# Altium PCB PCB_desing.PcbDoc
Units mm, origin at the board's own origin, x right, y up, seen from the top; angles counter-clockwise.
Board outline 50 x 39.8 mm, 2 copper layers (Top Layer, Bottom Layer), stack 1.671 mm thick; 35 components, 20 nets, 89 pads, 10 vias.
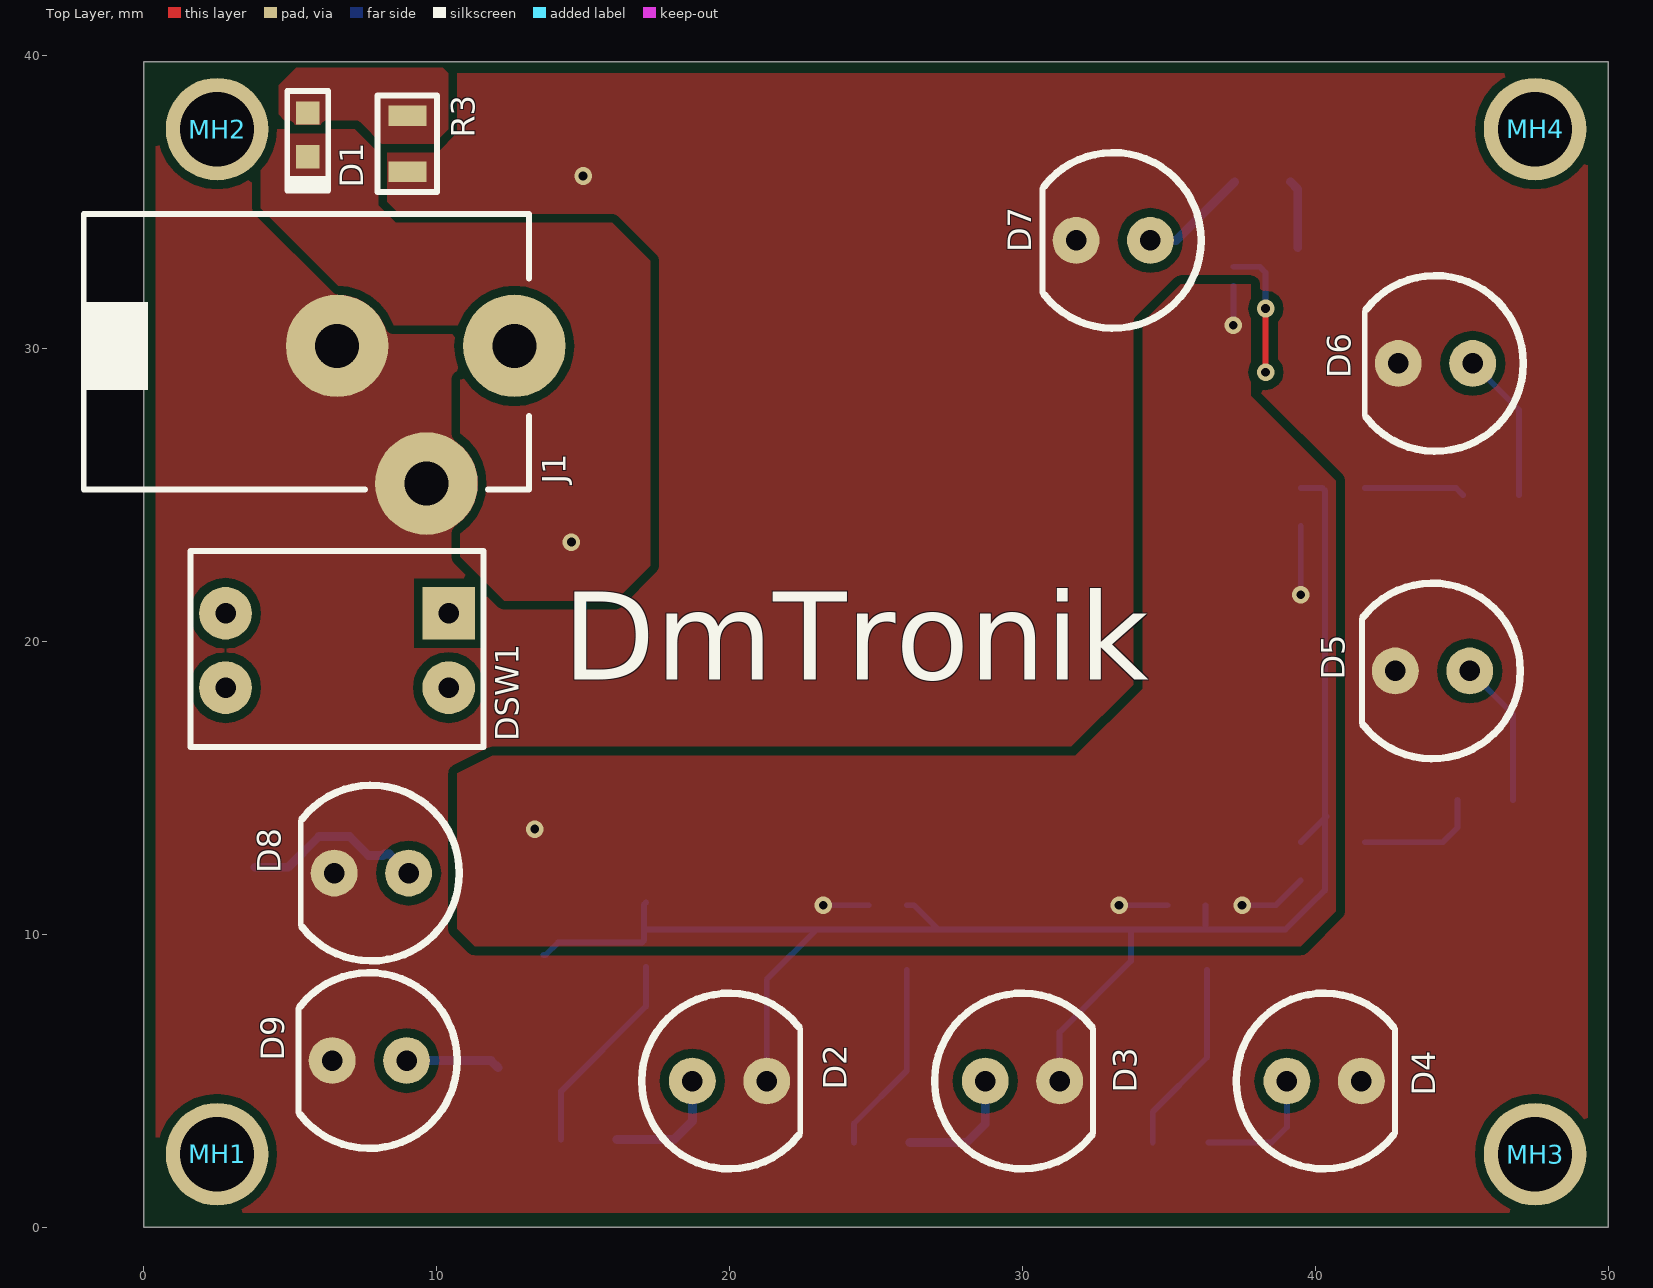
[diagram p0: Top Layer view]
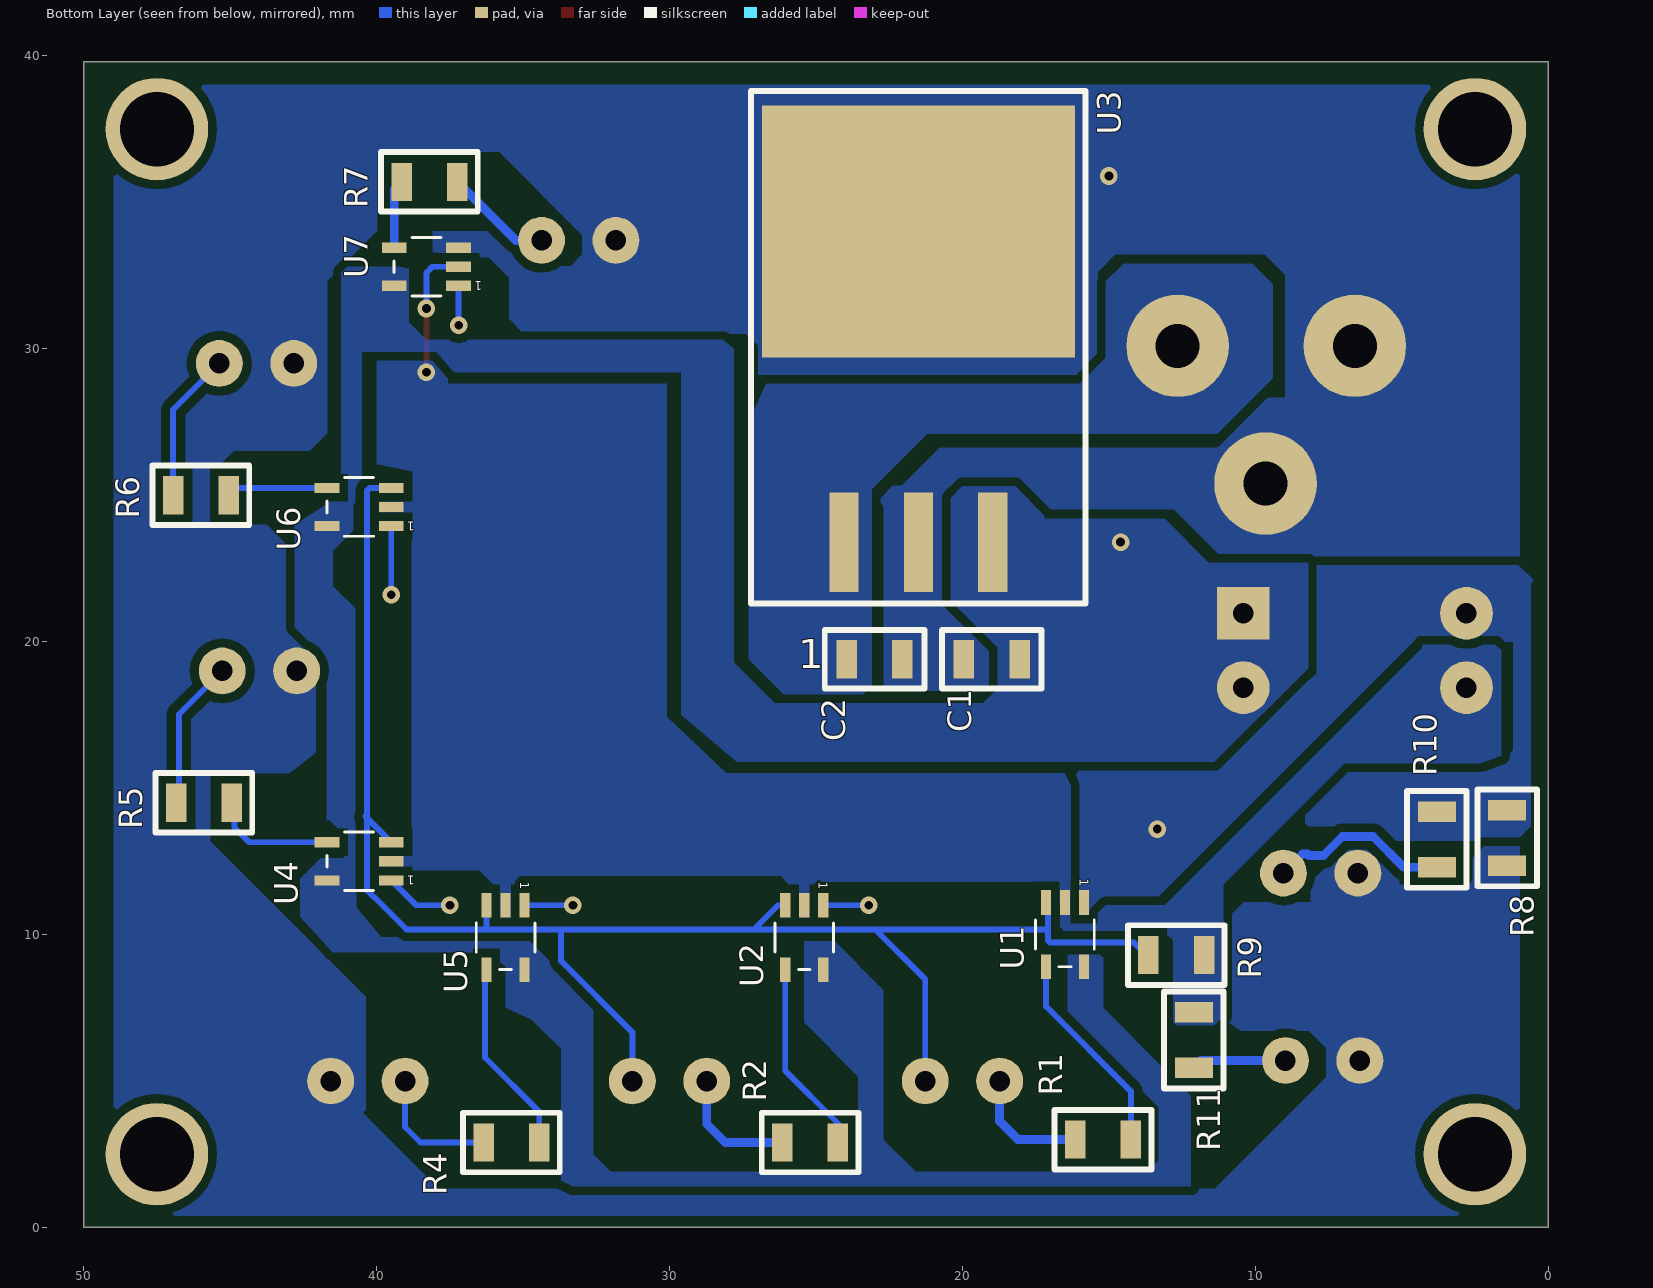
[diagram p1: Bottom Layer view, seen from below]
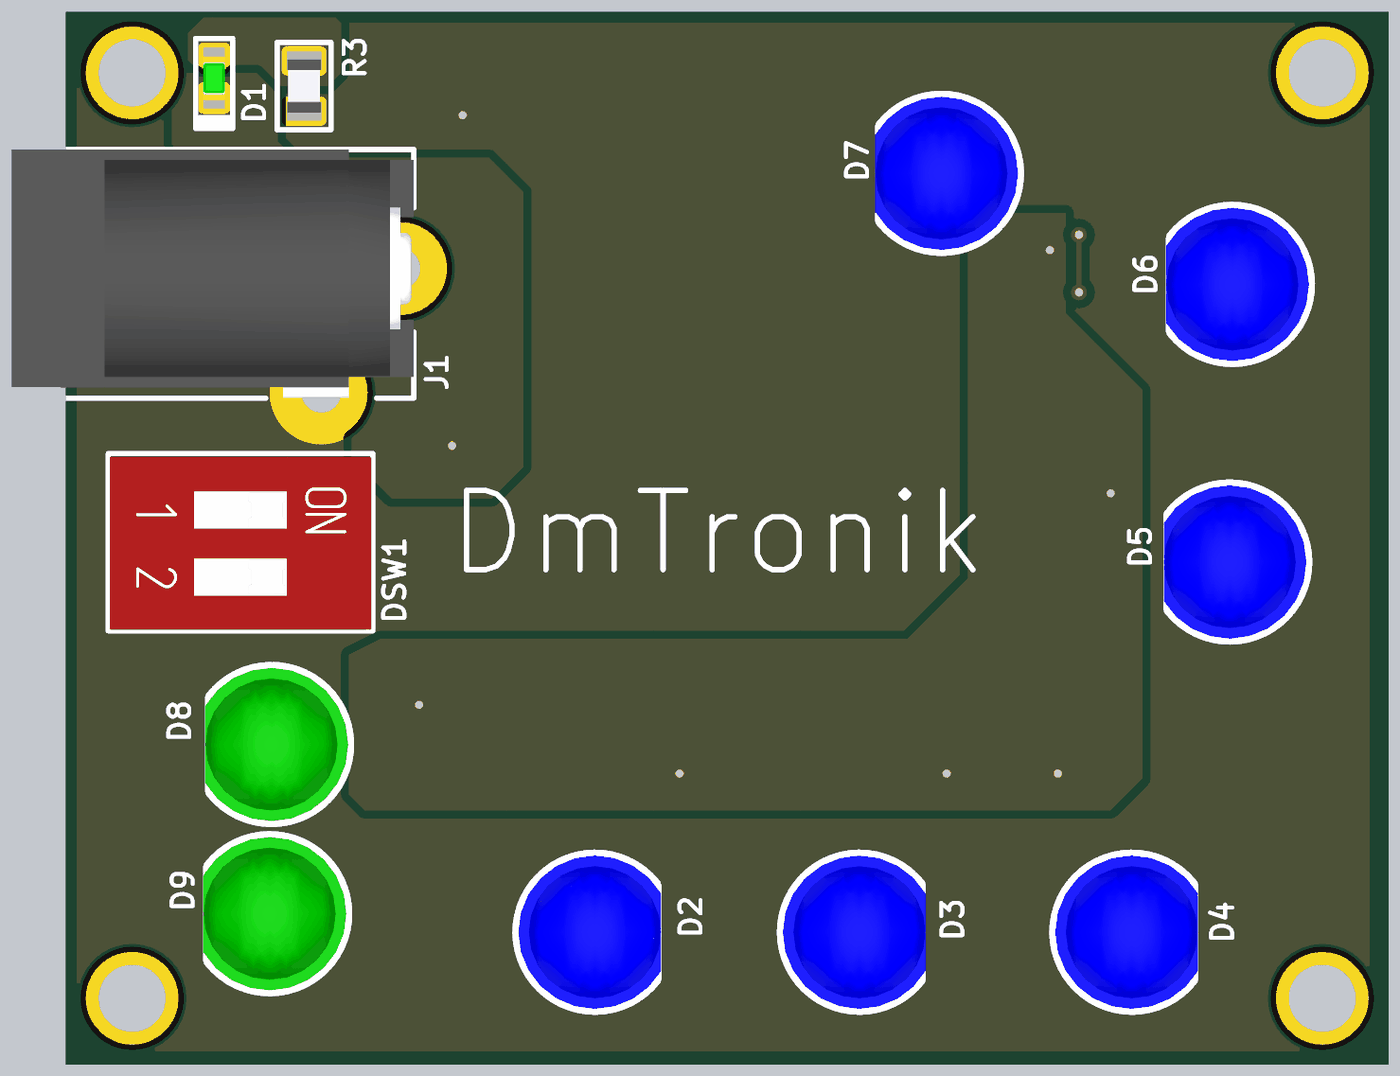
[diagram p2: 3D render of the assembled board from above, using the file's embedded part models]
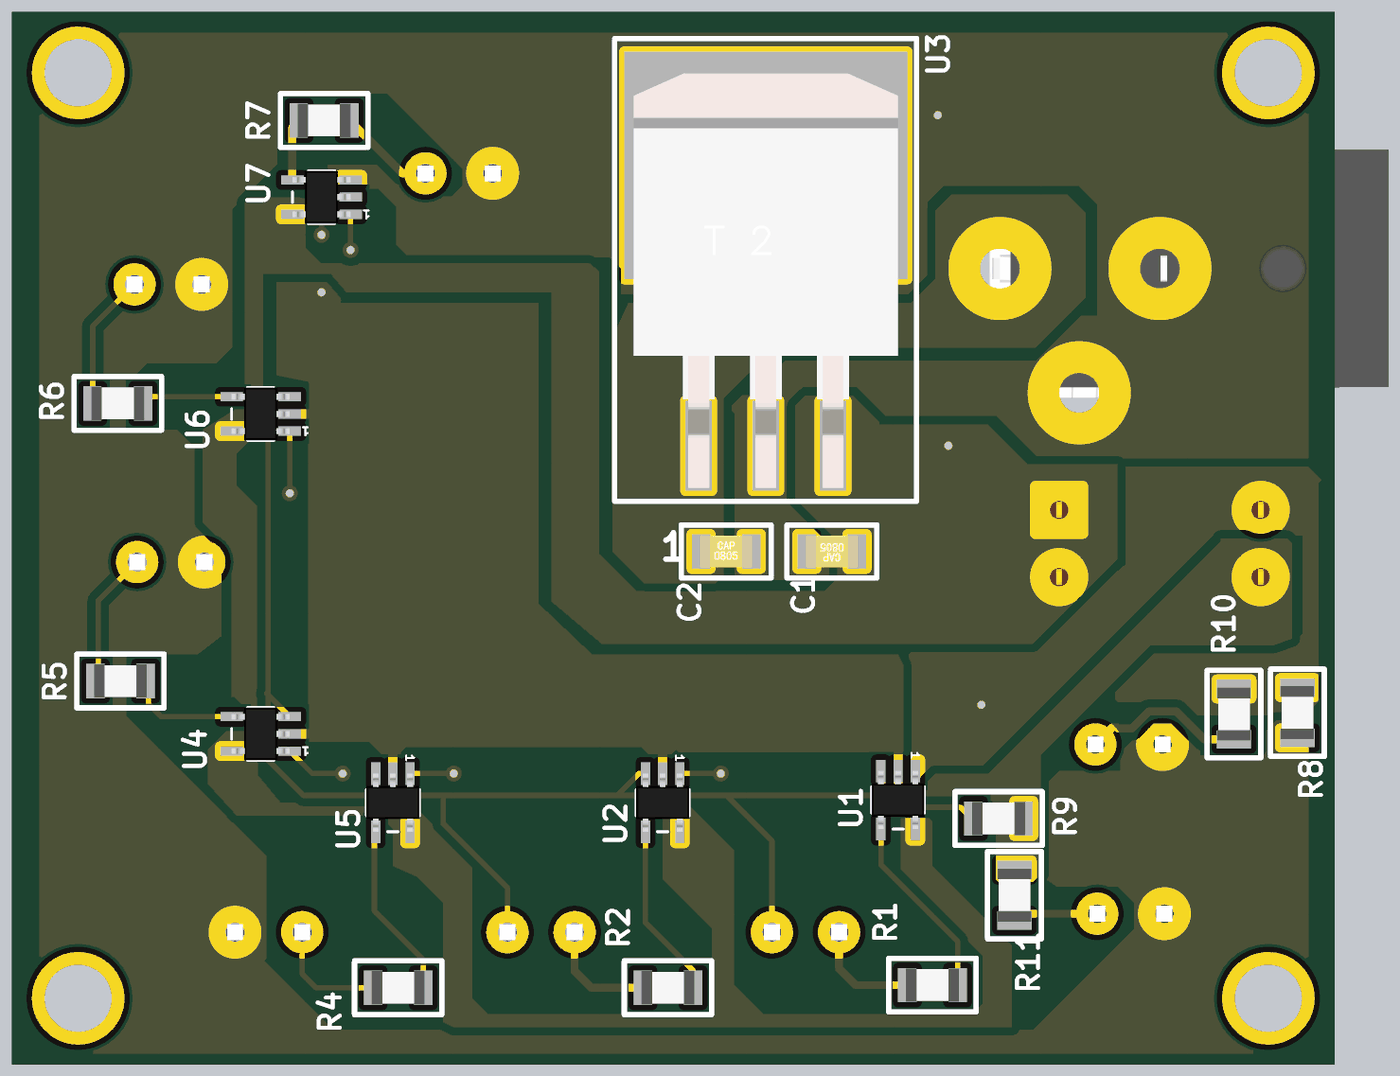
[diagram p3: 3D render of the assembled board from below, using the file's embedded part models]

## Layer stack, top to bottom
Top Solder: solder mask 0.0102, Solder Resist, Dk 3.5
Top Layer: signal copper 0.0356
Dielectric 1: dielectric 1.6, FR-4, Dk 4.8
Bottom Layer: signal copper 0.0356
Bottom Solder: solder mask 0.0102, Solder Resist, Dk 3.5

## Board outline
0,0 50,0 50,39.8 0,39.8

## Design rules (kind name [scope] priority, off if disabled: settings)
Clearance [All] p1: gap=0.3 ignorepadtopadclearanceinfootprint=FALSE
ComponentClearance [All] p1: gap=0.254 collisioncheckmode=3 verticalgap=0.3 showdistances=FALSE
HoleSize [All] p1: absolutevalues=TRUE maxlimit=2.54 minlimit=0.1 maxpercent=80.000 minpercent=20.000
MinimumSolderMaskSliver [All] p1: minsoldermaskwidth=0.2
PolygonConnect [All] p1: connectstyle=Direct reliefconductorwidth=0.254 reliefentries=4 polygonreliefangle="90 Angle" airgapwidth=0.254
RoutingVias [All] p1: holewidth=0.6 width=1 viastyle="Through Hole" minholewidth=0.6 minwidth=0.9 maxholewidth=0.8 maxwidth=1.2
SilkToSilkClearance [All] p1: silktosilkclearance=0.2
SilkToSolderMaskClearance [IsPad] p1: minsilkscreentomaskgap=0.1 clearancetoexposedcopper=TRUE
SolderMaskExpansion [All] p1: expansion=0.2
Width [All] p1: maxlimit=1 minlimit=0.2 preferedwidth=0.6
25 further rules are at their usual default settings.

## Components (designator, comment, footprint, x,y, rotation, side; value= is the part's Value field where it differs from the comment)
C1 "100nF" CAPACITOR0805 19,19.4 r0 bottom
C2 "330nF" CAPACITOR0805 23,19.4 r180 bottom
D1 "Green" LED0603 5.6,37.3 r90 top
D2 "Blue" LEDTHBLUE 20,5 r0 top
D3 "Blue" LEDTHBLUE 30,5 r0 top
D4 "Blue" LEDTHBLUE 40.3,5 r0 top
D5 "Blue" LEDTHBLUE 44,19 r180 top
D6 "Blue" LEDTHBLUE 44.1,29.5 r180 top
D7 "Blue" LEDTHBLUE 33.1,33.7 r180 top
D8 "Green" LEDTHGREEN 7.77,12.1 r180 top
D9 "Green" LEDTHGREEN 7.7,5.7 r180 top
DSW1 "DIP switch 2 pos" DIPSWITCH_1X02 6.6,19.7 r180 top
J1 "Conector Barril" JACKCONECTOR 12.65,30.1 r90 top
MH1 "Mounting Hole" MH 2.5,2.5 r0 top locked
MH2 "Mounting Hole" MH 2.5,37.5 r0 top locked
MH3 "Mounting Hole" MH 47.5,2.5 r0 top locked
MH4 "Mounting Hole" MH 47.5,37.5 r0 top locked
R1 "68 R" RESISTOR0805 15.2,3 r180 bottom
R2 "68 R" RESISTOR0805 25.2,2.9 r180 bottom
R3 "150 R" RESISTOR0805 9,37 r270 top
R4 "68 R" RESISTOR0805 35.4,2.9 r180 bottom
R5 "68 R" RESISTOR0805 45.9,14.5 r180 bottom
R6 "68 R" RESISTOR0805 46,25 r180 bottom
R7 "68 R" RESISTOR0805 38.2,35.7 r0 bottom
R8 "10k" RESISTOR0805 1.4,13.3 r270 bottom
R9 "10k" RESISTOR0805 12.7,9.3 r0 bottom
R10 "150 R" RESISTOR0805 3.8,13.25 r270 bottom
R11 "150 R" RESISTOR0805 12.1,6.4 r270 bottom
U1 "AND" DCK_SC_70_5 16.5,10 r270 bottom
U2 "OR" DCK_SC_70_5 25.4,9.9 r270 bottom
U3 "7805" T0-236 21.5,34 r270 bottom
U4 "NOR" DCK_SC_70_5 40.6,12.5 r0 bottom
U5 "NAND" DCK_SC_70_5 35.6,9.9 r270 bottom
U6 "XOR" DCK_SC_70_5 40.6,24.6 r0 bottom
U7 "XNOR" DCK_SC_70_5 38.3,32.8 r0 bottom

## Footprints (in the part's own frame and the unit in brackets; to place one, negate y for a bottom-side part, rotate by r counter-clockwise, add the part's x,y. Pads: shape width x height; smd on the part's side, far side on the other; paste and mask are expansions set on the pad)
CAPACITOR0805 [mm]
  rect 0.7x1.3 smd: 1(-0.95,0) 2(0.95,0)
  silkscreen extent -1.7,-1 1.7,1, body extent -1,-0.63 1,0.63, height 1.25
DCK_SC_70_5 [mm]
  rect 0.85x0.35 smd: 1(-1.1,0.65) 2(-1.1,0) 3(-1.1,-0.65) 4(1.1,-0.65) 5(1.1,0.65)
  silkscreen extent -0.5,-1 1.1,1, body extent -1.1,-1 1.1,1, height 0.91
DIPSWITCH_1X02 [mm]
  rect 1.8x1.8 hole 0.7: 1(-3.81,-1.27)
  round 1.8 hole 0.7: 2(3.81,-1.27) 3(-3.81,1.27) 4(3.81,1.27)
  silkscreen extent -5,-3.4 5,3.3, body extent -4.95,-3.27 4.95,3.27, height 6.8
JACKCONECTOR [mm]
  round 3.5 hole 1.5: 1(0,0) 2(0,6.05) 3(-4.7,3)
  silkscreen extent -4.9,-0.5 4.5,14.7, body extent -4.9,-0.5 4.5,14.7, height 11.01
LED0603 [mm]
  rect 0.8x0.8 smd: 1(-0.75,0) 2(0.75,0)
  silkscreen extent -1.9,-0.7 1.5,0.7, body extent -0.83,-0.4 0.83,0.4, height 0.81
LEDTHBLUE [mm]
  round 1.6 hole 0.7: 1(-1.27,0) 2(1.27,0)
  silkscreen extent -3,-3 2.41,3, body extent -2.9,-2.9 2.5,2.9, height 8.72
LEDTHGREEN [mm]
  round 1.6 hole 0.7: 1(-1.27,0) 2(1.27,0)
  silkscreen extent -3,-3 2.41,3, body extent -2.9,-2.9 2.5,2.9, height 8.72
MH [mm]
  round 3.5 hole 2.54 unplated: 1(0,0)
RESISTOR0805 [mm]
  rect 0.7x1.3 smd: 1(-0.95,0) 2(0.95,0)
  silkscreen extent -1.65,-1.02 1.65,1.02, body extent -1,-0.63 1,0.63, height 0.44
T0-236 [mm]
  rect 3.4x1 smd: 1(10.6,-2.54) 2(10.6,0) 3(10.6,2.54)
  rect 8.6x10.7 smd: 2(0,0)
  silkscreen extent -4.8,-5.72 12.7,5.7, body extent -3.47,-5 12.2,5, height 5.18

## Part data
C1: library part C0805C104K4RACTU, "KEMET - C0805C104K4RACTU - SMD Multilayer Ceramic Capacitor, 0.1 µF, 16 V, 0805 [2012 Metric], ± 10%, X7R, C Series KEMET", Case/Package=0805, Case Code (Metric)=2012, Dielectric=X7R, Dielectric Material=Ceramic, Manufacturer=KEMET, Max Operating Temperature=125°C, Min Operating Temperature=-55°C, Package Quantity=1, Tolerance=10%, Voltage=16V, Capacitance=100nF, Case Code (Imperial)=0805, ComponentLink1Description=http://www.farnell.com/datasheets/2741062.pdf?src-supplier=Element14, ComponentLink1URL=http://www.farnell.com/datasheets/2741062.pdf?src-supplier=Element14, Contact Plating=Tin,Matte, Depth=1.25mm, Height=0.9mm, Lead Pitch=0.75mm, Length=2mm, Manufacturer Part Number=C0805C104K4RACTU, Mount="Surface Mount,PCB", Number of Pins=2, Packaging="Tape and Reel", Pricing 1="4000=0.0363, 8000=0.035, 16000=0.034, 24000=0.0333, 32000=0.032 (USD)", Radiation Hardening=No, REACH SVHC="No SVHC", Stock 1=12000, Supplier 1=Avnet, Supplier Part Number 1=C0805C104K4RACTU, Termination=SMD/SMT, Thickness=0.035inch, Voltage Rating=16V, Voltage Rating (DC)=16V, Width=0.049inch
C2: library part CC0805JKX7R7BB334, "CAP CER 0.33UF 16V X7R 0805", Case/Package=0805, Dielectric=X7R, Manufacturer=Yageo, Max Operating Temperature=125°C, Min Operating Temperature=-55°C, Tolerance=5%, Voltage=16V, Capacitance=330nF, ComponentLink1Description=https://www.verical.com/server-webapp/html/getDatasheet?partID=403645&src-supplier=Verical, ComponentLink1URL=https://www.verical.com/server-webapp/html/getDatasheet?partID=403645&src-supplier=Verical, Depth=1.25mm, Halogen Free="Halogen Free", Lead Free="Lead Free", Length=2mm, Manufacturer Part Number=CC0805JKX7R7BB334, Material=Ceramic, Mount="Surface Mount", Packaging="Tape and Reel", Pricing 1="3000=0.0246, 6000=0.0243, 12000=0.0236, 18000=0.0231, 24000=0.0222 (USD)", Radiation Hardening=No, Stock 1=0, Supplier 1=Avnet, Supplier Part Number 1=CC0805JKX7R7BB334, Thickness=0.057inch, Voltage Rating=16V, Voltage Rating (DC)=16V, Width=0.049inch
D1: library part LTST-C191GKT, "LED GREEN CLEAR 0603 SMD", Case/Package=0603, Case Code (Metric)=1608, Forward Current=30mA, Forward Voltage=2.1V, Lens Color=Colorless, Manufacturer="Vishay Lite-On", Max Operating Temperature=85°C, Min Operating Temperature=-55°C, Package Quantity=1, Power Dissipation=100mW, Reverse Voltage=5V, Test Current=20mA, Case Code (Imperial)=0603, Color=Green, ComponentLink1Description=http://www1.futureelectronics.com/doc/LITE%20ON/LITE-ON%20LTST-C191GKT.pdf?src-supplier=Future+Electronics, ComponentLink1URL=http://www1.futureelectronics.com/doc/LITE%20ON/LITE-ON%20LTST-C191GKT.pdf?src-supplier=Future+Electronics, ComponentLink2Description=http://www.mouser.com/ds/2/239/liteon_ltst-c191gkt-371200.pdf?src-supplier=Mouser, ComponentLink2URL=http://www.mouser.com/ds/2/239/liteon_ltst-c191gkt-371200.pdf?src-supplier=Mouser, ComponentLink3Description=https://media.digikey.com/pdf/Data%20Sheets/Lite-On%20PDFs/LTST-C191GKT.pdf?src-supplier=Digi-Key, ComponentLink3URL=https://media.digikey.com/pdf/Data%20Sheets/Lite-On%20PDFs/LTST-C191GKT.pdf?src-supplier=Digi-Key, Depth=0.8mm, Dominant Wavelength=569nm, Height=0.55mm, Illumination Color=Green, Lead Free="Lead Free", Length=1.6mm, Lens Style=Clear,Diffused,Colorless,Rectangular, Lens Transparency=Clear, Luminous Intensity=12mcd, Manufacturer Part Number=LTST-C191GKT, Mount="Surface Mount", Number of Elements=1, Number of LEDs=1, Number of Pins=2, Packaging="Tape and Reel", Power Rating=100mW, Pricing 1="5000=0.037, 10000=0.0361, 20000=0.0344, 30000=0.0334, 40000=0.0327 (USD)", Radiation Hardening=No, Stock 1=0, Supplier 1=Avnet, Supplier Part Number 1=LTST-C191GKT, Viewing Angle=130°, Wavelength=565nm, Width=0.8mm
D2 D3 D4 D5 D6 D7: library part C503B-BCN-CV0Z0462, "Standard LEDs - Through Hole 30DG BL NOSTNDOF HI BRT LAMP 470NM 3.2V", Case/Package=Radial, Forward Current=20mA, Forward Voltage=3.2V, Lens Color=Colorless, Manufacturer=Cree, Max Operating Temperature=95°C, Min Operating Temperature=-40°C, Package Quantity=2500, Power Dissipation=120mW, Reverse Voltage=5V, Supplier Part Number 1=08R2921, Color=Blue, ComponentLink1Description=http://www.farnell.com/datasheets/1758062.pdf?src-supplier=Element14, ComponentLink1URL=http://www.farnell.com/datasheets/1758062.pdf?src-supplier=Element14, ComponentLink2Description=http://www.cree.com/~/media/Files/Cree/LED%20Components%20and%20Modules/HB/Data%20Sheets/C503B%20BAS%20BAN%20BCS%20BCN%20GAS%20GAN%20GCS%20GCN%201094.pdf?src-supplier=Digi-Key, ComponentLink2URL=http://www.cree.com/~/media/Files/Cree/LED%20Components%20and%20Modules/HB/Data%20Sheets/C503B%20BAS%20BAN%20BCS%20BCN%20GAS%20GAN%20GCS%20GCN%201094.pdf?src-supplier=Digi-Key, Depth=5.8mm, Dominant Wavelength=470nm, Height=10.3mm, Illumination Color=Blue, Length=5.8mm, Lens Style=Dome,Round, Lens Transparency=Clear, Luminous Intensity=7065mcd, Manufacturer Part Number=C503B-BCN-CV0Z0462, Mount="Through Hole", Number of Elements=1, Number of LEDs=1, Number of Pins=2, Packaging="Tape and Reel", Pricing 1="1=0.21, 10=0.196, 100=0.179, 500=0.171, 1000=0.162 (USD)", REACH SVHC=Unknown, Stock 1=0, Supplier 1=Avnet, Test Current=20mA, Viewing Angle=30°, Wavelength=470nm
D8 D9: library part C5SMF-RJF-CT0W0BB1, "LED RED CLEAR 5MM OVAL T/H", Case/Package=Radial, Color=Red, Forward Current=20mA, Forward Voltage=2.1V, Manufacturer=Cree, Max Operating Temperature=95°C, Min Operating Temperature=-40°C, Package Quantity=500, Supplier Part Number 1=45W7905, ComponentLink1Description=http://www.cree.com/led-components/media/documents/C5SMF-RJF-RJE-GJF-GJE-BJF-BJE-1240.pdf?src-supplier=Digi-Key, ComponentLink1URL=http://www.cree.com/led-components/media/documents/C5SMF-RJF-RJE-GJF-GJE-BJF-BJE-1240.pdf?src-supplier=Digi-Key, Dominant Wavelength=621nm, Height=10.95mm, Illumination Color=Red, Lens Color=Red, Lens Style=Elliptical, Lens Transparency=Clear, Luminous Intensity=2640mcd, Manufacturer Part Number=C5SMF-RJF-CT0W0BB1, Mount="Through Hole", Packaging=Bulk, Pricing 1="1=0.144, 10=0.144, 30=0.144, 50=0.144, 100=0.144 (USD)", Stock 1=0, Supplier 1=Avnet, Test Current=20mA, Viewing Angle=40°
DSW1: library part A6T-2104, "Slide Switch,STRAIGHT,DPST,ON-OFF,Number Of Positions:2,PC TAIL Terminal,PCB Hole Count:4", Case/Package=DIP, Contact Current Rating=25mA, Contact Resistance=200mR, Manufacturer=Omron, Max Operating Temperature=70°C, Max Voltage Rating (DC)=24V, Min Operating Temperature=-20°C, Package Quantity=76, Supplier Part Number 1=A6T2104, Actuator Length=0.6mm, Actuator Type="Slide (Standard)", ComponentLink1Description=http://www.omron.com/ecb/products/pdf/en-a6t.pdf?src-supplier=Digi-Key, ComponentLink1URL=http://www.omron.com/ecb/products/pdf/en-a6t.pdf?src-supplier=Digi-Key, ComponentLink2Description=http://www.farnell.com/datasheets/54384.pdf?src-supplier=Element14, ComponentLink2URL=http://www.farnell.com/datasheets/54384.pdf?src-supplier=Element14, ComponentLink3Description=http://www.mouser.com/ds/2/307/A6T_1110-10807.pdf?src-supplier=Mouser, ComponentLink3URL=http://www.mouser.com/ds/2/307/A6T_1110-10807.pdf?src-supplier=Mouser, Contact Material=Gold, Contact Plating=Gold, Current Rating=25mA, Electrical Life=1000Cycles, Height=4.2mm, Lead Free="Lead Free", Length=0.237inch, Manufacturer Part Number=A6T-2104, Max Current Rating=25mA, Mechanical Life=1000Cycles, Mount="Through Hole,PCB", Number of Circuits=2, Number of Positions=2, Orientation=Straight, Packaging=Rail/Tube, Pitch=0.1inch, Pricing 1="76=0.9571, 152=0.9269, 304=0.8834, 456=0.8585, 608=0.8274 (USD)", Radiation Hardening=No, REACH SVHC=Unknown, Stock 1=0, Supplier 1=Avnet, Terminal Pitch=2.54mm, Termination="PC Pins", Throw Configuration=SPST, Voltage Rating (DC)=24V, Washable=No, Weight=0.26g, Width=6.2mm
J1: library part KLDX-0202-A, "Conn Power PIN 2 POS Solder RA Thru-Hole 3 Terminal 1 Port", Color=Black, Current Rating=3.5A, Flammability Rating="UL94 V-0", Insulation Resistance=100MR, Manufacturer=Kycon, Max Operating Temperature=85°C, Min Operating Temperature=-25°C, Package Quantity=500, Voltage Rating=24V, Connector Type=Power, Contact Gender=Female, Contact Material=Brass, Contact Plating=Tin, Gender=Female, Housing Material=PBT, Manufacturer Part Number=KLDX-0202-A, Mount="Through Hole", Number of Contacts=2, Orientation="Right Angle", Packaging=Bag, Radiation Hardening=No, Stock 1=0, Supplier 1=Avnet, Supplier Part Number 1=KLDX-0202-A, Termination=Solder, Voltage Rating (DC)=24V
MH1 MH2 MH3 MH4: library part MountingHole
R1 R2 R4 R5 R6 R7: library part ERA-8AEB680V, "RES SMD 68 OHM 0.1% 1/4W 1206", Case/Package=1206, Case Code (Metric)=3216, Manufacturer=Panasonic, Max Operating Temperature=155°C, Max Power Dissipation=250mW, Min Operating Temperature=-55°C, Package Quantity=5000, Resistance=68R, Temperature Coefficient=25ppm/°C, Tolerance=0.1%, Voltage Rating=300V, Case Code (Imperial)=1206, ComponentLink1Description=http://industrial.panasonic.com/www-data/pdf/AOA0000/AOA0000CE26.pdf?src-supplier=Avnet+Europe, ComponentLink1URL=http://industrial.panasonic.com/www-data/pdf/AOA0000/AOA0000CE26.pdf?src-supplier=Avnet+Europe, ComponentLink2Description=http://www.farnell.com/datasheets/391390.pdf?src-supplier=Element14, ComponentLink2URL=http://www.farnell.com/datasheets/391390.pdf?src-supplier=Element14, ComponentLink3Description=http://industrial.panasonic.com/www-data/pdf/AOA0000/AOA0000CE26.pdf?src-supplier=Avnet, ComponentLink3URL=http://industrial.panasonic.com/www-data/pdf/AOA0000/AOA0000CE26.pdf?src-supplier=Avnet, ComponentLink4Description=https://www.distrelec.biz/Web/Downloads/_t/ds/ERA_eng_tds.pdf?mime=application%2Fpdf&src-supplier=Distrelec, ComponentLink4URL=https://www.distrelec.biz/Web/Downloads/_t/ds/ERA_eng_tds.pdf?mime=application%2Fpdf&src-supplier=Distrelec, Composition="Metal Film,Thin Film", Contact Plating=Tin, Depth=1.6mm, Height=0.6mm, Lead Free="Lead Free", Length=3.2mm, Manufacturer Part Number=ERA-8AEB680V, Military Standard=Not, Mount="Surface Mount", Number of Pins=2, Number of Terminations=2, Packaging="Tape and Reel", Power Rating=250mW, Pricing 1="5000=0.1506, 10000=0.1475, 20000=0.1455, 30000=0.1413, 40000=0.1382 (USD)", Radiation Hardening=No, REACH SVHC="No SVHC", Stock 1=0, Supplier 1=Avnet, Supplier Part Number 1=ERA-8AEB680V, Termination=SMD/SMT, Voltage Rating (DC)=300V, Weight=0.000571oz, Width=1.6mm
R3 R10 R11: library part "RC0805JR-07150RL (2)", "YAGEO (PHYCOMP)   RC0805JR-07150RL   Surface Mount Chip Resistor, Thick Film, RC Series, 150 ohm, 125 mW,  5%, 150 V", Case/Package=0805, Case Code (Metric)=2012, Manufacturer=Yageo, Manufacturer Part Number=RC0805JR-07150RL, Max Operating Temperature=155°C, Min Operating Temperature=-55°C, Power Rating=125mW, Resistance=150R, Temperature Coefficient=100ppm/°C, Tolerance=5%, Voltage Rating=150V, Case Code (Imperial)=0805, ComponentLink1Description=http://www.farnell.com/datasheets/444164.pdf?src-supplier=Element14, ComponentLink1URL=http://www.farnell.com/datasheets/444164.pdf?src-supplier=Element14, ComponentLink2Description=http://www.farnell.com/datasheets/442941.pdf?src-supplier=Element14, ComponentLink2URL=http://www.farnell.com/datasheets/442941.pdf?src-supplier=Element14, Composition="Thick Film", Contact Plating=Tin,Matte,Lead, Lead Free="Lead Free", Packaging="Tape and Reel", Pricing 1="5000=0.0021, 10000=0.002, 20000=0.002, 30000=0.0019, 40000=0.0018 (USD)", Radiation Hardening=No, REACH SVHC=Unknown, Stock 1=0, Supplier 1=Avnet, Supplier Part Number 1=RC0805JR-07150RL, Termination=SMD/SMT
R8 R9: library part RNCP0805FTD10K0, "RES 10K OHM 1% 1/4W 0805", Case/Package=0805, Case Code (Metric)=2012, Manufacturer="Stackpole Electronics", Max Operating Temperature=155°C, Max Power Dissipation=250mW, Min Operating Temperature=-55°C, Resistance=10kR, Temperature Coefficient=100ppm/°C, Tolerance=1%, Case Code (Imperial)=0805, ComponentLink1Description=https://www.seielect.com/catalog/SEI-Packaging.pdf?src-supplier=Digi-Key, ComponentLink1URL=https://www.seielect.com/catalog/SEI-Packaging.pdf?src-supplier=Digi-Key, Composition="Thin Film", Features="Moisture Resistant,Anti-Sulfur", Height=0.024inch, Lead Free="Lead Free", Length=0.079inch, Manufacturer Part Number=RNCP0805FTD10K0, Mount="Surface Mount", Number of Terminations=2, Packaging="Tape and Reel", Pricing 1="5000=0.0068, 10000=0.0067, 20000=0.0065, 30000=0.0064, 40000=0.0061 (USD)", Stock 1=0, Supplier 1=Avnet, Supplier Part Number 1=RNCP0805FTD10K0, Width=0.049inch
U1: library part SN74AHCT1G08DCKR, "IC GATE AND 1CH 2-INP SC70-5", Case/Package=SC, High Level Output Current=-8mA, Low Level Output Current=8mA, Manufacturer="Texas Instruments", Max Operating Temperature=125°C, Max Supply Voltage=5.5V, Min Operating Temperature=-40°C, Min Supply Voltage=4.5V, Operating Supply Voltage=5V, Package Quantity=3000, Quiescent Current=1uA, ComponentLink1Description=http://www.farnell.com/datasheets/1834083.pdf?src-supplier=Element14, ComponentLink1URL=http://www.farnell.com/datasheets/1834083.pdf?src-supplier=Element14, ComponentLink2Description=http://www.farnell.com/datasheets/1763941.pdf?src-supplier=Element14, ComponentLink2URL=http://www.farnell.com/datasheets/1763941.pdf?src-supplier=Element14, ComponentLink3Description=http://www.farnell.com/datasheets/1882756.pdf?src-supplier=Element14, ComponentLink3URL=http://www.farnell.com/datasheets/1882756.pdf?src-supplier=Element14, ComponentLink4Description=http://www.ti.com/lit/ds/symlink/sn74ahct1g08.pdf?src-supplier=Digi-Key, ComponentLink4URL=http://www.ti.com/lit/ds/symlink/sn74ahct1g08.pdf?src-supplier=Digi-Key, Contact Plating=Gold, Height=0.9mm, Lead Free="Lead Free", Length=2mm, Logic Function=AND, Manufacturer Part Number=SN74AHCT1G08DCKR, Max Output Current=8mA, Mount="Surface Mount", Number of Bits=1, Number of Circuits=1, Number of Elements=1, Number of Gates=1, Number of Input Lines=2, Number of Inputs=2, Number of Output Lines=1, Number of Outputs=1, Number of Pins=5, Output Current=8mA, Packaging="Tape and Reel", Pricing 1="9000=0.0434, 15000=0.0417, 24000=0.0398, 45000=0.0386, 90000=0.0372 (USD)", Propagation Delay=7.9ns, Radiation Hardening=No, REACH SVHC="No SVHC", Schmitt Trigger Input=No, Stock 1=0, Supplier 1=Avnet, Supplier Part Number 1=SN74AHCT1G08DCKR, Termination=SMD/SMT, Turn-On Delay Time=9ns, Weight=8.8E-05oz, Width=1.25mm
U2: library part SN74LVC1G32DCKR, "IC GATE OR 1CH 2-INP SC70-5", Case/Package=SC, High Level Output Current=-32mA, Low Level Output Current=32mA, Manufacturer="Texas Instruments", Max Operating Temperature=125°C, Max Supply Voltage=5.5V, Min Operating Temperature=-40°C, Min Supply Voltage=1.65V, Package Quantity=1, Quiescent Current=10uA, ComponentLink1Description=http://www.ti.com/lit/ds/symlink/sn74lvc1g32.pdf?src-supplier=Digi-Key, ComponentLink1URL=http://www.ti.com/lit/ds/symlink/sn74lvc1g32.pdf?src-supplier=Digi-Key, ComponentLink2Description=http://www.ti.com/general/docs/lit/getliterature.tsp?genericPartNumber=SN74LVC1G32&amp;&amp;fileType=pdf&src-supplier=Farnell, ComponentLink2URL=http://www.ti.com/general/docs/lit/getliterature.tsp?genericPartNumber=SN74LVC1G32&amp;&amp;fileType=pdf&src-supplier=Farnell, ComponentLink3Description=https://www.verical.com/server-webapp/html/getDatasheet?partID=127914&src-supplier=Verical, ComponentLink3URL=https://www.verical.com/server-webapp/html/getDatasheet?partID=127914&src-supplier=Verical, ComponentLink4Description=http://www.jameco.com/Jameco/Products/ProdDS/756781.pdf?src-supplier=Jameco, ComponentLink4URL=http://www.jameco.com/Jameco/Products/ProdDS/756781.pdf?src-supplier=Jameco, ComponentLink5Description=http://www.ti.com/general/docs/lit/getliterature.tsp?genericPartNumber=SN74LVC1G32&amp;&amp;fileType=pdf&src-supplier=Avnet+Asia, ComponentLink5URL=http://www.ti.com/general/docs/lit/getliterature.tsp?genericPartNumber=SN74LVC1G32&amp;&amp;fileType=pdf&src-supplier=Avnet+Asia, ComponentLink6Description=http://www.farnell.com/datasheets/1768050.pdf?src-supplier=Element14, ComponentLink6URL=http://www.farnell.com/datasheets/1768050.pdf?src-supplier=Element14, ComponentLink7Description=http://www.ti.com/general/docs/lit/getliterature.tsp?genericPartNumber=SN74LVC1G32&&fileType=pdf&src-supplier=Avnet, ComponentLink7URL=http://www.ti.com/general/docs/lit/getliterature.tsp?genericPartNumber=SN74LVC1G32&&fileType=pdf&src-supplier=Avnet, ComponentLink8Description=http://focus.ti.com/lit/ds/symlink/sn74lvc1g32.pdf?src-supplier=Avnet+Europe, ComponentLink8URL=http://focus.ti.com/lit/ds/symlink/sn74lvc1g32.pdf?src-supplier=Avnet+Europe, Contact Plating=Gold, Height=0.9mm, Lead Free="Lead Free", Length=2mm, Logic Function=OR, Manufacturer Part Number=SN74LVC1G32DCKR, Max Output Current=32mA, Mount="Surface Mount", Number of Bits=1, Number of Circuits=1, Number of Elements=1, Number of Gates=1, Number of Input Lines=2, Number of Inputs=2, Number of Output Lines=1, Number of Outputs=1, Number of Pins=5, Output Current=32mA, Packaging="Tape and Reel", Pricing 1="3000=0.0341, 6000=0.0328, 12000=0.0312, 18000=0.0304, 24000=0.0293 (USD)", Propagation Delay=4ns, Radiation Hardening=No, REACH SVHC="No SVHC", Schmitt Trigger Input=No, Stock 1=0, Supplier 1=Avnet, Supplier Part Number 1=SN74LVC1G32DCKR, Termination=SMD/SMT, Turn-On Delay Time=4.5ns, Weight=8.8E-05oz, Width=1.25mm
U3: library part UA7805CKTTR, "LDO Regulator Pos 5V 1.5A 4-Pin(3+Tab) TO-263 T/R", Case/Package=TO-263, Dropout Voltage=2V, Manufacturer="Texas Instruments", Max Input Voltage=25V, Max Operating Temperature=125°C, Max Output Current=1.5A, Max Output Voltage=5.2V, Min Input Voltage=7V, Min Operating Temperature=0°C, Min Output Voltage=4.8V, Nominal Output Voltage=5V, Package Quantity=1, Power Rating=15W, Power Supply Rejection Ratio (PSRR)=78dB, Quiescent Current=8mA, ComponentLink1Description=http://www.farnell.com/datasheets/1882245.pdf?src-supplier=Element14, ComponentLink1URL=http://www.farnell.com/datasheets/1882245.pdf?src-supplier=Element14, ComponentLink2Description=http://www.ti.com/lit/ds/symlink/ua78.pdf?src-supplier=Digi-Key, ComponentLink2URL=http://www.ti.com/lit/ds/symlink/ua78.pdf?src-supplier=Digi-Key, ComponentLink3Description=http://www.farnell.com/datasheets/1994325.pdf?src-supplier=Element14, ComponentLink3URL=http://www.farnell.com/datasheets/1994325.pdf?src-supplier=Element14, ComponentLink4Description=http://www.ti.com/general/docs/lit/getliterature.tsp?genericPartNumber=UA7812&&fileType=pdf&src-supplier=Avnet, ComponentLink4URL=http://www.ti.com/general/docs/lit/getliterature.tsp?genericPartNumber=UA7812&&fileType=pdf&src-supplier=Avnet, Contact Plating=Tin,Matte, Height=4.83mm, Lead Free="Lead Free", Length=10.67mm, Manufacturer Part Number=UA7805CKTTR, Mount="Surface Mount", Number of Outputs=1, Number of Pins=3, Number of Regulators=1, Output Current=1.5A, Output Type=Fixed, Output Voltage=5V, Packaging="Tape and Reel", Polarity=Positive, Pricing 1="1000=0.3875, 2000=0.3725, 3000=0.355, 5000=0.345, 10000=0.3325 (USD)", Radiation Hardening=No, REACH SVHC="No SVHC", Stock 1=0, Supplier 1=Avnet, Supplier Part Number 1=UA7805CKTTR, Weight=0.050897oz, Width=9.65mm
U4: library part SN74LVC1G02MDCKREP, "Enhanced Product Single 2-Input Positive-Nor Gate 5-SC70 -55 to 125", Case/Package=SC, High Level Output Current=-32mA, Low Level Output Current=32mA, Manufacturer="Texas Instruments", Max Operating Temperature=125°C, Max Supply Voltage=5.5V, Min Operating Temperature=-55°C, Min Supply Voltage=1.65V, Package Quantity=1, Quiescent Current=10uA, ComponentLink1Description=http://www.ti.com/general/docs/lit/getliterature.tsp?genericPartNumber=SN74LVC1G02-EP&&fileType=pdf&src-supplier=Avnet, ComponentLink1URL=http://www.ti.com/general/docs/lit/getliterature.tsp?genericPartNumber=SN74LVC1G02-EP&&fileType=pdf&src-supplier=Avnet, ComponentLink2Description=http://www.ti.com/lit/ds/symlink/sn74lvc1g02-ep.pdf?src-supplier=Digi-Key, ComponentLink2URL=http://www.ti.com/lit/ds/symlink/sn74lvc1g02-ep.pdf?src-supplier=Digi-Key, ComponentLink3Description=http://focus.ti.com/lit/ds/symlink/sn74lvc1g02-ep.pdf?src-supplier=Avnet+Europe, ComponentLink3URL=http://focus.ti.com/lit/ds/symlink/sn74lvc1g02-ep.pdf?src-supplier=Avnet+Europe, ComponentLink4Description=http://www.produktinfo.conrad.com/datenblaetter/1000000-1099999/001073413-da-01-en-IC_SNGL_2_SN74LVC1G02MDCKREP_SC_70_5_TID.pdf?src-supplier=Conrad, ComponentLink4URL=http://www.produktinfo.conrad.com/datenblaetter/1000000-1099999/001073413-da-01-en-IC_SNGL_2_SN74LVC1G02MDCKREP_SC_70_5_TID.pdf?src-supplier=Conrad, Lead Free="Lead Free", Logic Function=NOR, Manufacturer Part Number=SN74LVC1G02MDCKREP, Mount="Surface Mount", Number of Bits=1, Number of Circuits=1, Number of Elements=1, Number of Gates=1, Number of Input Lines=2, Number of Inputs=2, Number of Output Lines=1, Number of Outputs=1, Number of Pins=5, Output Current=32mA, Packaging="Tape and Reel", Pricing 1="3000=0.8727, 6000=0.8389, 12000=0.7995, 18000=0.7769, 24000=0.7488 (USD)", Propagation Delay=5ns, Radiation Hardening=No, REACH SVHC="No SVHC", Stock 1=0, Supplier 1=Avnet, Supplier Part Number 1=SN74LVC1G02MDCKREP, Turn-On Delay Time=6ns, Weight=8.8E-05oz
U5: library part SN74LVC1G00DCKR, "TEXAS INSTRUMENTS         SN74LVC1G00DCKR            NAND Gate, LVC Family, 1 Gate, 2 Input, 32 mA, 1.65V to 5.5V, SC-70-5", Case/Package=SC, High Level Output Current=-32mA, Low Level Output Current=32mA, Manufacturer="Texas Instruments", Max Operating Temperature=125°C, Max Supply Voltage=5.5V, Min Operating Temperature=-40°C, Min Supply Voltage=1.65V, Operating Supply Voltage=5V, Package Quantity=1, Quiescent Current=10uA, ComponentLink1Description=http://www.farnell.com/datasheets/1887494.pdf?src-supplier=Element14, ComponentLink1URL=http://www.farnell.com/datasheets/1887494.pdf?src-supplier=Element14, ComponentLink2Description=http://www.jameco.com/Jameco/Products/ProdDS/1043571.pdf?src-supplier=Jameco, ComponentLink2URL=http://www.jameco.com/Jameco/Products/ProdDS/1043571.pdf?src-supplier=Jameco, ComponentLink3Description=http://www.ti.com/lit/ds/symlink/sn74lvc1g00.pdf?src-supplier=Digi-Key, ComponentLink3URL=http://www.ti.com/lit/ds/symlink/sn74lvc1g00.pdf?src-supplier=Digi-Key, ComponentLink4Description=http://www.ti.com/general/docs/lit/getliterature.tsp?genericPartNumber=SN74LVC1G00&&fileType=pdf&src-supplier=Avnet, ComponentLink4URL=http://www.ti.com/general/docs/lit/getliterature.tsp?genericPartNumber=SN74LVC1G00&&fileType=pdf&src-supplier=Avnet, ComponentLink5Description=https://www.verical.com/server-webapp/html/getDatasheet?partID=189925&src-supplier=Verical, ComponentLink5URL=https://www.verical.com/server-webapp/html/getDatasheet?partID=189925&src-supplier=Verical, ComponentLink6Description=http://www.produktinfo.conrad.com/datenblaetter/1000000-1099999/001075097-da-01-en-IC_NAND_GATE_2_SN74LVC1G00DCKR_SC_70_TID.pdf?src-supplier=Conrad, ComponentLink6URL=http://www.produktinfo.conrad.com/datenblaetter/1000000-1099999/001075097-da-01-en-IC_NAND_GATE_2_SN74LVC1G00DCKR_SC_70_TID.pdf?src-supplier=Conrad, Contact Plating=Gold, Height=0.9mm, Lead Free="Lead Free", Length=2mm, Logic Function=NAND, Manufacturer Part Number=SN74LVC1G00DCKR, Max Output Current=32mA, Mount="Surface Mount", Number of Bits=1, Number of Circuits=1, Number of Elements=1, Number of Gates=1, Number of Input Lines=2, Number of Inputs=2, Number of Output Lines=1, Number of Outputs=1, Number of Pins=5, Output Current=32mA, Packaging="Tape and Reel", Pricing 1="3000=0.0341, 6000=0.0328, 12000=0.0312, 18000=0.0304, 24000=0.0293 (USD)", Propagation Delay=4ns, Radiation Hardening=No, REACH SVHC="No SVHC", Schmitt Trigger Input=No, Stock 1=0, Supplier 1=Avnet, Supplier Part Number 1=SN74LVC1G00DCKR, Termination=SMD/SMT, Turn-On Delay Time=4.3ns, Weight=8.8E-05oz, Width=1.25mm
U6: library part SN74LVC1G86DCKR, "TEXAS INSTRUMENTS - SN74LVC1G86DCKR - XOR Gate, 74LVC1G86, 2 Input, 32 mA, 1.65 V to 5.5 V, SC-70-5", Case/Package=SC, High Level Output Current=-32mA, Low Level Output Current=32mA, Manufacturer="Texas Instruments", Max Operating Temperature=125°C, Max Supply Voltage=5.5V, Min Operating Temperature=-40°C, Min Supply Voltage=1.65V, Package Quantity=1, Quiescent Current=10uA, ComponentLink1Description=http://www.ti.com/lit/ds/symlink/sn74lvc1g86.pdf?src-supplier=Digi-Key, ComponentLink1URL=http://www.ti.com/lit/ds/symlink/sn74lvc1g86.pdf?src-supplier=Digi-Key, ComponentLink2Description=http://www.farnell.com/datasheets/1850935.pdf?src-supplier=Element14, ComponentLink2URL=http://www.farnell.com/datasheets/1850935.pdf?src-supplier=Element14, ComponentLink3Description=http://www.ti.com/general/docs/lit/getliterature.tsp?genericPartNumber=SN74LVC1G86&&fileType=pdf&src-supplier=Avnet, ComponentLink3URL=http://www.ti.com/general/docs/lit/getliterature.tsp?genericPartNumber=SN74LVC1G86&&fileType=pdf&src-supplier=Avnet, ComponentLink4Description=http://www.ti.com/general/docs/lit/getliterature.tsp?genericPartNumber=SN74LVC1G86&amp;&amp;fileType=pdf&src-supplier=Avnet+Asia, ComponentLink4URL=http://www.ti.com/general/docs/lit/getliterature.tsp?genericPartNumber=SN74LVC1G86&amp;&amp;fileType=pdf&src-supplier=Avnet+Asia, Contact Plating=Gold, Height=1mm, Lead Free="Lead Free", Length=2.15mm, Logic Function=XOR,OR, Manufacturer Part Number=SN74LVC1G86DCKR, Max Output Current=32mA, Mount="Surface Mount", Number of Bits=1, Number of Circuits=1, Number of Elements=1, Number of Gates=1, Number of Input Lines=2, Number of Inputs=2, Number of Output Lines=1, Number of Outputs=1, Number of Pins=5, Output Current=32mA, Packaging="Tape and Reel", Pricing 1="12500=0.031, 13000=0.0298, 26000=0.0284, 63000=0.0276, 130000=0.0266 (USD)", Propagation Delay=4ns, Radiation Hardening=No, REACH SVHC="No SVHC", Schmitt Trigger Input=No, Stock 1=0, Supplier 1=Avnet, Supplier Part Number 1=SN74LVC1G86DCKR, Termination=SMD/SMT, Turn-On Delay Time=5ns, Weight=8.8E-05oz, Width=1.4mm
U7: library part SN74AUP1T87DCKR, "TEXAS INSTRUMENTS - SN74AUP1T87DCKR - LOGIC, XNOR GATE, SINGLE, SC-70-5", Case/Package=SC, High Level Output Current=4mA, Manufacturer="Texas Instruments", Max Operating Temperature=85°C, Max Supply Voltage=3.6V, Min Operating Temperature=-40°C, Min Supply Voltage=2.3V, Nominal Supply Current=900nA, Package Quantity=1, Quiescent Current=500nA, ComponentLink1Description=http://focus.ti.com/lit/ds/symlink/sn74aup1t87.pdf?src-supplier=Avnet, ComponentLink1URL=http://focus.ti.com/lit/ds/symlink/sn74aup1t87.pdf?src-supplier=Avnet, ComponentLink2Description=http://www.ti.com/general/docs/lit/getliterature.tsp?genericPartNumber=SN74AUP1T87&&fileType=pdf&src-supplier=Avnet, ComponentLink2URL=http://www.ti.com/general/docs/lit/getliterature.tsp?genericPartNumber=SN74AUP1T87&&fileType=pdf&src-supplier=Avnet, ComponentLink3Description=http://www.farnell.com/datasheets/2020581.pdf?src-supplier=Element14, ComponentLink3URL=http://www.farnell.com/datasheets/2020581.pdf?src-supplier=Element14, ComponentLink4Description=http://www.ti.com/lit/ds/symlink/sn74aup1t87.pdf?src-supplier=Digi-Key, ComponentLink4URL=http://www.ti.com/lit/ds/symlink/sn74aup1t87.pdf?src-supplier=Digi-Key, Lead Free="Lead Free", Logic Function=NOR,XNOR, Low Level Output Current=4mA, Manufacturer Part Number=SN74AUP1T87DCKR, Mount="Surface Mount", Number of Bits=1, Number of Circuits=1, Number of Elements=1, Number of Gates=1, Number of Inputs=2, Number of Outputs=1, Number of Pins=5, Output Current=4mA, Packaging="Tape and Reel", Pricing 1="6000=0.093, 12000=0.0894, 18000=0.0852, 30000=0.0828, 60000=0.0798 (USD)", Propagation Delay=4.4ns, Radiation Hardening=No, REACH SVHC="No SVHC", Stock 1=0, Supplier 1=Avnet, Supplier Part Number 1=SN74AUP1T87DCKR

## Via types
v1: diameter 0.6, hole 0.3, Top Layer to Bottom Layer, tented both sides, 10 vias

## Nets (pads, with @x,y where several pads share a name; then routed paths per layer and width w, separated by ;. In a path a pad name is that pad's centre, name@x,y a point inside that pad or via, vN(x,y) a via of type N, cw(c..) or ccw(c..) an arc to the next point about the centre after c; other vN are vias at no path point)
+5V: C1.1 D1.1 DSW1.1 DSW1.3 U1.5 U2.5 U3.3 U4.5 U5.5 U6.5 U7.5
  other v1: 14.6,23.4
A: DSW1.2 R8.1 R10.1 U1.1 U2.1 U4.1 U5.1 U6.1 U7.1 | length 9.4
  Bottom Layer w0.2: v1@23.1,11.1 v1(23.2,11) U2.1 ; v1(33.3,11) U5.1 ; v1(37.2,30.8) U7.1 ; v1(37.5,11) 38.65,11 U4.1 ; v1(39.5,21.6) U6.1
  other v1: 13.35,13.6
B: DSW1.4 R9.1 R11.1 U1.2 U2.2 U4.2 U5.2 U6.2 U7.2 | length 4.6
  Top Layer w0.2: v1(38.3,29.2) v1(38.3,31.375)
  Bottom Layer w0.2: U7.2 38.1,32.8 38.3,32.6 v1(38.3,31.375)
GND: C1.2 C2.2 D2.2 D3.2 D4.2 D5.2 D6.2 D7.2 D8.2 D9.2 J1.2 J1.3 R3.2 R8.2 R9.2 U1.3 U2.3 U3.2 U4.3 U5.3 U6.3 U7.3 | length 58.8
  Bottom Layer w0.2: R9.2 13.716,9.3 14.141,9.725 17,9.725 17.075,9.8 17.075,10.2 ; U1.3 17.075,11.025 17.075,10.2 ; D2.2 21.27,8.47 22.975,10.175 ; U2.3 26.3,11 27.125,10.175 ; D3.2 31.27,6.67 33.7,9.1 33.7,10.175 ; U5.3 36.25,10.225 36.2,10.175 ; U4.3 40.325,13.975 40.325,11.51 40.091,11.275 40.075,11.275 38.975,10.175 36.2,10.175 ; U6.3 40.241,25.25 40.325,25.166 40.325,14.075 40.375,14.025 ; 17.075,10.2 17.1,10.175 22.975,10.175 ; 22.975,10.175 27.125,10.175 ; 27.125,10.175 33.7,10.175 ; 33.7,10.175 36.2,10.175
  other v1: 15,35.9
NetD1_2: D1.2 R3.1
NetD2_1: D2.1 R1.1 | length 4.2
  Bottom Layer w0.3: R1.1 18.1,3 18.73,3.63 D2.1
NetD3_1: D3.1 R2.1 | length 4.3
  Bottom Layer w0.3: R2.1 28.1,2.9 28.73,3.53 D3.1
NetD4_1: D4.1 R4.1 | length 4.5
  Bottom Layer w0.2: R4.1 38.5,2.9 39.03,3.43 D4.1
NetD5_1: D5.1 R5.1 | length 5
  Bottom Layer w0.2: D5.1 46.75,17.52 R5.1@46.75,14.6
NetD6_1: D6.1 R6.1 | length 5.2
  Bottom Layer w0.2: D6.1 46.95,27.92 R6.1
NetD7_1: D7.1 R7.1 | length 3.7
  Bottom Layer w0.3: D7.1 35.25,33.7 R7.1
NetD8_1: D8.1 R10.2 | length 6.2
  Bottom Layer w0.3: R10.2 4.932,12.3 5.982,13.35 7.021,13.35 7.671,12.7 8.169,12.7 8.219,12.75 8.39,12.75 D8.1
NetD9_1: D9.1 R11.2 | length 3.2
  Bottom Layer w0.3: D9.1 11.85,5.7 R11.2
S1: R1.2 U1.4 | length 7.1
  Bottom Layer w0.2: R1.2 14.25,4.65 17.15,7.55 U1.4
S2: R2.2 U2.4 | length 6.6
  Bottom Layer w0.2: R2.2 24.25,3.55 26.05,5.35 U2.4
S3: R4.2 U5.4 | length 6.7
  Bottom Layer w0.2: R4.2 34.45,3.95 36.3,5.8 U5.4@36.3,8.8
S4: R5.2 U4.4 | length 4.3
  Bottom Layer w0.2: U4.4 44.35,13.15 44.85,13.65 R5.2@44.85,14.6
S5: R6.2 U6.4 | length 3.5
  Bottom Layer w0.2: U6.4 44.8,25.25 R6.2
S6: R7.2 U7.4 | length 2.4
  Bottom Layer w0.3: R7.2 39.4,35.45 U7.4
Vcc: C2.1 J1.1 U3.1
pads on no net: MH1.1 MH2.1 MH3.1 MH4.1

## Polygon pours and split planes (outlines as drawn)
GND on Top Layer "GND" (solid, remove dead copper, pour order 8): 0.4,39.4 49.3,39.4 49.3,0.499 0.4,0.499
NetD1_2 on Top Layer "LED" (solid, remove dead copper, pour order 6): 8.1,37 9.9,37 10.4,37.5 10.4,39.4 10.2,39.6 5.2,39.6 4.6,39 4.6,38 5.1,37.5 7.6,37.5
+5V on Top Layer "VCC" (solid, remove dead copper, pour order 2): 7.2,37.5 8,36.7 8,34.9 8.6,34.3 16,34.3 17.3,33 17.3,22.6 16.1,21.4 12.3,21.4 10.8,22.9 10.8,30.8 8,30.8 4,34.8 4,37.5
A on Top Layer "A" (solid, remove dead copper, pour order 0): 11.9,16.1 31.8,16.1 34.1,18.4 34.1,30.9 35.4,32.2 37.8,32.2 37.8,28.4 40.7,25.5 40.7,10.8 39.5,9.6 11.3,9.6 10.7,10.2 10.7,15.5
A on Bottom Layer "A" (solid, remove dead copper, pour order 24): 1.1,22.7 0.5,22.1 0.6,22 0.6,13.7 1.1,13.2 5.3,13.2 5.8,13.7 8.2,13.7 8.3,13.8 8.3,14.2 6.8,15.7 1.8,15.7 1.2,16.3 1.2,20 4.6,20 13.5,11.1 15.3,11.1 15.3,10.8 15.725,10.375 16.228,10.375 16.228,11.872 16,12.1 16.1,12.2 16.1,15.5 15.9,15.7 11.8,15.7 11.8,16.2 10.8,17.2 9.979,17.2 7.9,18.912 7.9,20.5 7.9,22.7
GND on Bottom Layer "GND" (solid, remove dead copper, pour order 22): 0.978,39.021 48.978,39.021 48.978,0.4 0.978,0.4 0.978,13.021 2.178,13.021 2.578,12.621 2.578,11.9 2.666,11.7 5.078,11.7 5.078,12.021 6.078,13.021 6.878,13.021 8.1,11.798 8.1,11.1 10.4,11.1 10.9,10.6 10.9,7 10.5,6.721 8.178,6.721 7.578,6.121 7.578,5.122 11.379,1.321 37.878,1.321 40.478,3.921 40.378,4.021 40.378,7.878 45.678,13.178 45.678,15.5 42.986,15.5 42.078,16.2 42.078,19.721 43.1,20.743 43.1,23.343 43.757,24 45.6,24 45.678,24.078 45.678,25.72 44.878,26.521 42.278,26.521 41.678,27.121 41.678,32.322 39.978,34.022 39.978,36.721 35.821,36.721 32.978,33.878 32.978,33.221 33.378,32.821 34.778,32.821 35.978,34.021 38.078,34.021 38.078,33.321 37.878,33.121 36.178,33.121 35.478,32.421 35.478,31.021 34.978,30.521 27.393,30.521 26.978,30.106 26.978,29.121 16.078,29.121 15.378,29.821 15.378,32.621 14.778,33.221 9.678,33.221 8.978,32.521 8.978,28.321 9.578,28.321 11.278,26.621 20.778,26.621 22.078,25.321 22.378,25.321 22.878,24.821 22.678,24.621 22.678,18.321 19.078,18.321 18.978,18.421 19.078,18.521 19.078,19.721 20.678,21.321 20.678,25.021 20.078,25.621 18.078,25.621 16.978,24.521 12.778,24.521 11.178,22.921 0.978,22.921
B on Bottom Layer "B" (solid, remove dead copper, pour order 20): 37.2,28.9 38,29.7 40,29.7 40,26.06 38.8,25.82 38.8,24.8 39.9,24.8 40,24.7 40,24.4 39.9,24.3 38.9,24.3 38.8,24.2 38.8,12.9 38.9,12.8 39.9,12.8 40,12.7 40,12.3 39.9,12.2 36.5,12.2 35.9,11.6 35.9,10.6 35.7,10.4 35.4,10.4 35.3,10.5 35.3,11.8 35.1,12 26.2,12 25.7,11.5 25.7,10.6 25.5,10.4 25.2,10.4 25.1,10.5 25.1,11.7 24.9,11.9 24.8,11.8 16.9,11.8 16.7,11.6 16.7,10.3 16.4,10 13,10 12.8,9.8 12.8,8.9 12.8,7 12.7,6.9 11.4,6.9 11.1,7.2 11.1,11.7 6.95,15.85 2.3,15.85 1.6,16.1 1.6,17.5 1.6,19.7 1.8,19.9 4.3,19.9 4.3,19.8 13.1,11 15.1,11 15.7,10.4 16,10.4 16.3,10.625 16.3,15.1 16.5,15.5 28.061,15.5 30.1,17.432 30.1,28.8 38.1,28.8 37.6,28.8 37.5,28.9
+5V on Bottom Layer "5V" (solid, remove dead copper, pour order 16): 8.2,22.7 11.6,22.7 13.1,24.2 17.2,24.2 17.2,24.3 18.2,25.3 20,25.3 20.4,24.9 20.4,21.4 18.8,19.8 18.8,18.4 19.3,17.9 26.4,17.9 27.8,19.3 27.8,30 28.175,30.3 38.3,30.3 38.9,30.9 38.9,32.74 39.2,32.8 41,32.8 41.2,32.6 41.2,32.2 41.2,25 42.8,24 42.8,20.5 41.7,19.4 41.7,13.9 41.6,13.9 41.1,13.4 41.1,12.6 41.9,12.6 42.6,11.9 42.6,10.611 41.5,9.4 40.4,9.4 36,9.4 36,9.3 35.6,8.9 35.6,7.5 34.7,7.1 33.7,6.1 33.7,1.6 33.3,1.4 12.2,1.4 12.2,4.5 15.2,7.5 15.2,9.2 15.5,9.5 15.6,9.4 16.4,9.4 16.4,7.2 13.3,4.1 13.3,2.3 13.7,1.9 21.6,1.9 22.7,3 22.7,8.1 24.4,9.8 25.4,9.8 25.4,7 23.549,5.149 23.549,2.035 23.7,1.884 23.716,1.9 32,1.9 32.6,2.5 32.6,7.6 34.9,9.9 39.847,9.9 40.7,10.936 40.7,12 40.7,21.1 41.5,21.9 41.5,23.1 40.8,23.8 40.8,24.7 40.5,25 40.5,29.9 38.1,29.9 37.957,29.9 37.357,29.2 29.6,29.2 29.6,17.5 27.7,15.9 26.8,15.9 11.4,15.9 8.2,19.1
Vcc on Bottom Layer "VC" (solid, remove dead copper, pour order 10): 10.1,32.9 9.4,32.2 9.4,29 11.3,27.1 21.2,27.1 23.1,25.2 23.1,18.5 23.4,18.2 26.1,18.2 27.3,19.4 27.3,21.3 27.3,27.5 26.7,28.8 16,28.8 15.1,29.7 15.1,32.3 14.5,32.9

## Silkscreen, mask and mechanical layers (free items; w line width, h text height)
Top Overlay:
  text "DmTronik" at 14.3,18.7 h3
BoardOutline:
  lines w0.5: 0,0 0,40 50,40 50,0 0,0

## Text inside footprints (layer, text, board x,y; h text height)
U1: Bottom Overlay "1" at 16,11.9 h0.3 r90
U2: Bottom Overlay "1" at 24.9,11.8 h0.3 r90
U3: Bottom Overlay "1" at 25.6,19.1 h1
U4: Bottom Overlay "1" at 38.7,12 h0.3 r180
U5: Bottom Overlay "1" at 35.1,11.8 h0.3 r90
U6: Bottom Overlay "1" at 38.7,24.1 h0.3 r180
U7: Bottom Overlay "1" at 36.4,32.3 h0.3 r180